# Allegro board LCD.brd
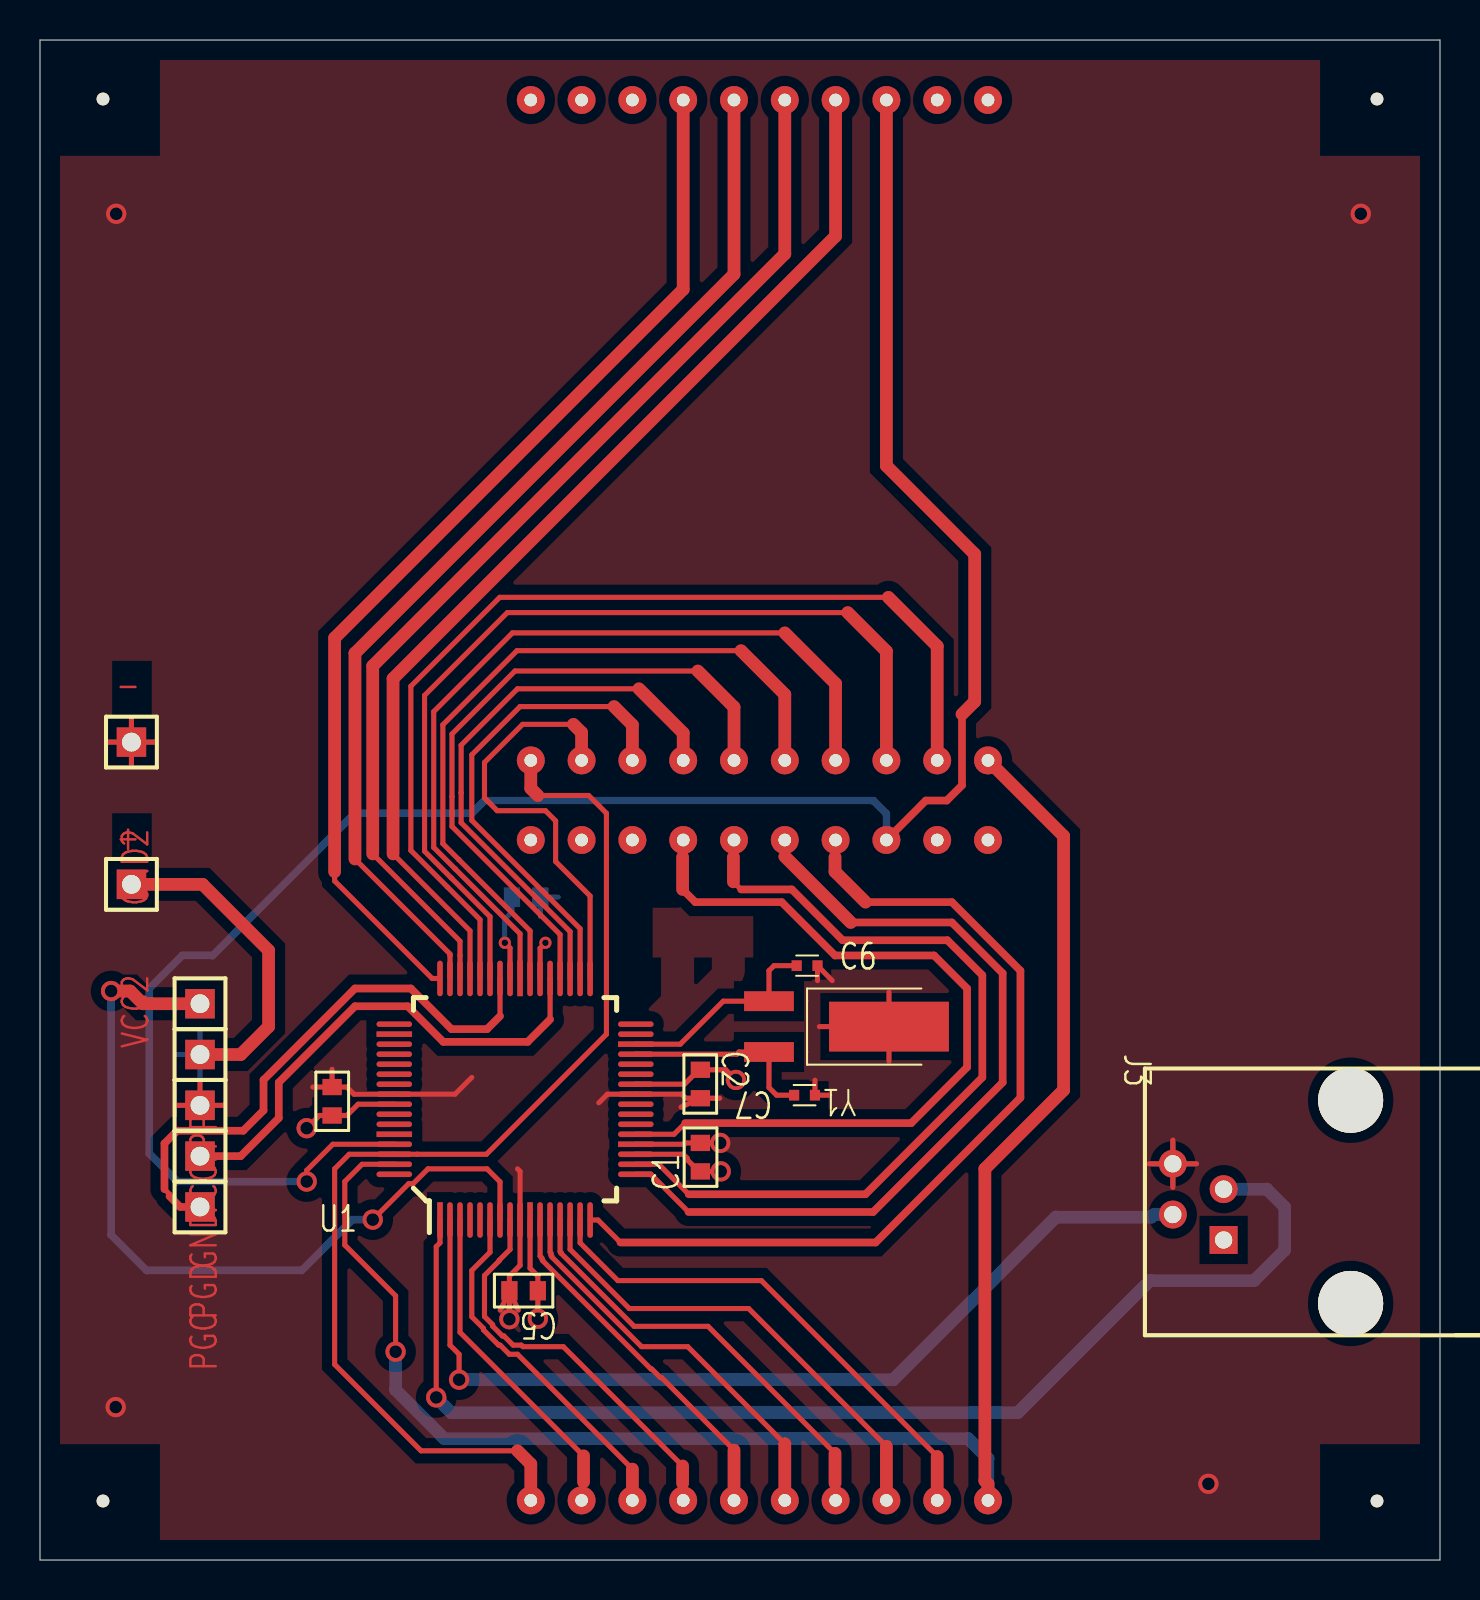
[diagram p0: board, top side]
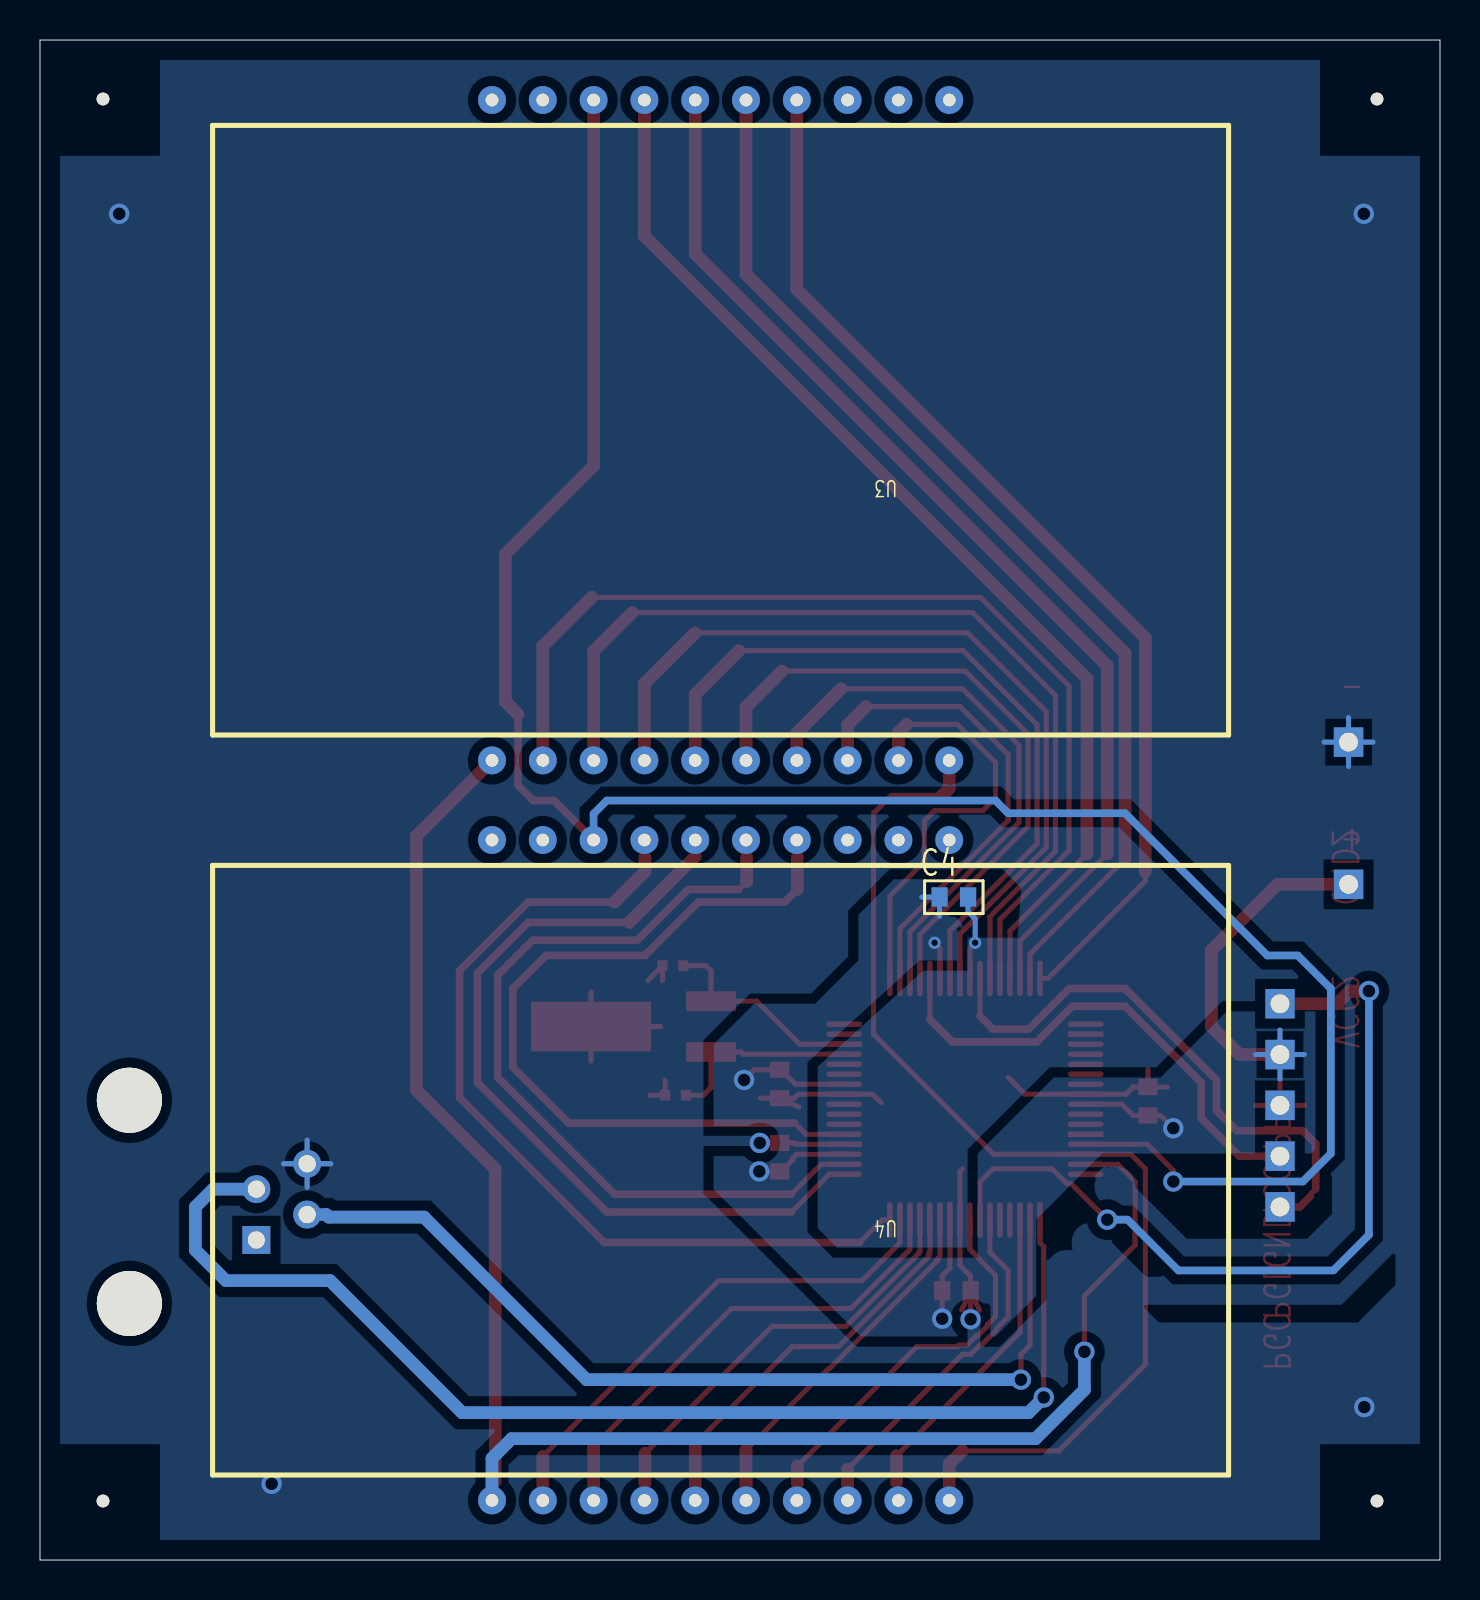
[diagram p1: board, bottom side, seen from below]

Outline 70 x 76 mm; copper layers: TOP, BOTTOM. Coordinates in mm from the lower left corner of the outline.
Outline path: 0,76 0,0 70,0 70,76 0,76

## Placement (name value [footprint] x y rotation side)
C1  470nF  [SMC0603]  33.02 19.43 90 top
C2  470nF  [SMC0603]  33.02 24.51 270 top
C3  470nF  [SMC0603]  14.61 22.23 90 top
C4  470nF  [SMC0603]  25.02 33.15 180 bottom
C5  470nF  [SMC0603]  24.89 13.46 180 top
C6  33pF  [C_0402]  38.35 29.72 0 top
C7  33pF  [C_0402]  38.23 23.24 180 top
GND  PINPAD  [BLKCON100VHTM1SQW1001]  8 22.73 0 top
GND2  PINPAD  [BLKCON100VHTM1SQW1001]  4.57 40.89 0 top
J3  Sensor  [TELETM420FACE6X4ALT]  59.18 16 270 top
NOREF  -  [unnamed]  3.15 2.95 0 top
NOREF#2  -  [unnamed]  66.85 2.95 0 top
NOREF#3  -  [unnamed]  66.85 73.05 0 top
NOREF#4  -  [unnamed]  3.15 73.05 0 top
PGC  PINPAD  [BLKCON100VHTM1SQW1001]  8 17.65 0 top
PGD  PINPAD  [BLKCON100VHTM1SQW1001]  8 20.19 0 top
U1  PIC16F1947  [QUAD50M64WG1260]  20 17 0 top
U3  VIM-404-DP  [VIM_404]  22 73 0 bottom
U4  VIM-404-DP  [VIM_404]  22 36 0 bottom
VCC  PINPAD  [BLKCON100VHTM1SQW1001]  8 25.27 0 top
VCC2  PINPAD  [BLKCON100VHTM1SQW1001]  4.57 33.78 0 top
VPP  PINPAD  [BLKCON100VHTM1SQW1001]  8 27.81 0 top
Y1  32.768kHz  [32_KHZ]  39.62 26.67 180 top

## Library data of the parts
C1-C5 = CAP NP
C6 C7 = C_1: room: xtal
GND GND2 PGC PGD VCC VCC2 VPP = PINPAD: room: dsp_sol
J3 = HEADER 4
U1 = PIC16LF1947
U3 U4 = VIM-404-DP
Y1 = CRYSTAL_2: room: xtal

## Footprints (pads in the part's own frame, mm; a bottom-side part is the same pattern mirrored in y, then rotated)
32_KHZ
  rect 2.489x0.991 smd: 1(3.175,1.27) 2(3.175,-1.27)
  rect 5.994x2.489 smd: 3(-2.825,0)
BLKCON100VHTM1SQW1001
  rect 1.473x1.473 hole 0.94: 1(0,0)
C_0402
  rect 0.508x0.533 smd: 1(-0.521,0) 2(0.521,0)
QUAD50M64WG1260
  rect 0.279x1.778 smd: 1(0,0) 10(4.503,0) 40(4.003,12.078)
  oval 0.279x1.778 smd: 2(0.5,0) 3(1.001,0) 4(1.501,0) 5(2.001,0) 6(2.502,0) 7(3.002,0) 8(3.503,0) 9(4.003,0) 11(5.004,0) 12(5.504,0) 13(6.005,0) 14(6.505,0) 15(7.005,0) 16(7.506,0) 33(7.506,12.078) 34(7.005,12.078) 35(6.505,12.078) 36(6.005,12.078) 37(5.504,12.078) 38(5.004,12.078) 39(4.503,12.078) 41(3.503,12.078) 42(3.002,12.078) 43(2.502,12.078) 44(2.001,12.078) 45(1.501,12.078) 46(1.001,12.078) 47(0.5,12.078) 48(0,12.078)
  oval 1.778x0.279 smd: 17(9.792,2.286) 18(9.792,2.786) 19(9.792,3.287) 21(9.792,4.287) 22(9.792,4.788) 23(9.792,5.288) 24(9.792,5.789) 25(9.792,6.289) 26(9.792,6.789) 27(9.792,7.29) 28(9.792,7.79) 29(9.792,8.291) 31(9.792,9.291) 32(9.792,9.792) 49(-2.286,9.792) 51(-2.286,8.791) 52(-2.286,8.291) 53(-2.286,7.79) 54(-2.286,7.29) 55(-2.286,6.789) 56(-2.286,6.289) 57(-2.286,5.789) 58(-2.286,5.288) 59(-2.286,4.788) 61(-2.286,3.787) 62(-2.286,3.287) 63(-2.286,2.786) 64(-2.286,2.286)
  rect 1.778x0.279 smd: 20(9.792,3.787) 30(9.792,8.791) 50(-2.286,9.291) 60(-2.286,4.287)
SMC0603
  rect 0.813x0.965 smd: 1(0,0) 2(1.422,0)
TELETM420FACE6X4ALT
  round 3.251 hole 3.251: (-6.985,6.35) (3.175,6.35)
  rect 1.397x1.397 hole 0.864: 1(0,0)
  round 1.397 hole 0.864: 2(-1.27,-2.54) 3(-2.54,0) 4(-3.81,-2.54)
unnamed
  round 0.635 hole 3.175 unplated: (0,0)
VIM_404
  round 1.397 hole 0.635: 1(2.54,0) 2(5.08,0) 3(7.62,0) 4(10.16,0) 5(12.7,0) 6(15.24,0) 7(17.78,0) 8(20.32,0) 9(22.86,0) 10(25.4,0) 11(25.4,33.02) 12(22.86,33.02) 13(20.32,33.02) 14(17.78,33.02) 15(15.24,33.02) 16(12.7,33.02) 17(10.16,33.02) 18(7.62,33.02) 19(5.08,33.02) 20(2.54,33.02)

## Nets
+5V: J3.1
GND: C1.2 C2.2 C3.2 C4.2 C5.2 C6.2 C7.1 GND.1 GND2.1 J3.4 U1.9(VSS#9) U1.20(AVSS) U1.25(VSS#25) U1.41(VSS#41) U1.56(VSS#56) Y1.3
VCC: C1.1 C2.1 C3.1 C4.1 C5.1 U1.10(VDD#10) U1.19(AVDD) U1.26(VDD#26) U1.38(VDD#38) U1.57(VDD#57) VCC.1 VCC2.1
COM0: U1.63(RE3/P3C/COM0) U3.11(COM1) U4.11(COM1)
COM1: U1.62(RE4/P3B/COM1) U3.20(COM2) U4.20(COM2)
COM2: U1.61(RE5/P1C/COM2) U3.8(COM3) U4.8(COM3)
COM3: U1.60(RE6/P1B/COM3)
ICD_CLK: PGC.1 U1.42(RB6/ICSPCLK/ICDCLK/SEG38)
ICD_DAT: PGD.1 U1.37(RB7/ICSPDAT/ICDDAT/SEG39)
RE0: J3.2 U1.2(VLCD1/P2D/RE0)
RE1: J3.3 U1.1(VLCD2/P2C/RE1)
SEG0: U1.58(RD0/P2D/SEG0)
SEG1: U1.55(RD1/P2C/SEG1)
SEG2: U1.54(RD2/P2B/SEG2)
SEG3: U1.53(RD3/P3C/SEG3)
SEG4: U1.52(RD4/SDO2/P3B/SEG4)
SEG5: U1.51(RD5/SDI2/SDA2/P1C/SEG5)
SEG6: U1.50(RD6/SCK2/SCL2/P1B/SEG6)
SEG7: U1.49(RD7/SS2/SEG7)
SEG8: U1.47(RB1/SEG8) U3.5(2B/2C/2P)
SEG9: U1.46(RB2/SEG9) U3.6(3B/3C/3P)
SEG10: U1.45(RB3/SEG10) U3.7(4B/4C)
SEG11: U1.44(RB4/SEG11) U3.12(4A/4G/4D)
SEG12: U1.36(RC5/SDO1/SEG12) U3.16(2A//2G/2D)
SEG13: U1.33(RC2/CCP1/P1A/SEG13) U3.19(1F/1E)
SEG14: U1.28(T0CKI/RA4/SEG14)
SEG15: U1.27(CPS4/AN4/RA5/SEG15)
SEG16: U1.35(RC4/SDI1/SDA1/SEG16) U3.17(2F/2E)
SEG17: U1.34(RC3/SCK1/SCL1/SEG17) U3.18(1A/1G/1D)
SEG18: U1.23(CPS1/AN1/RA1/SEG18)
SEG19: U1.17(SRNQ/C2OUT/CPS6/AN6/RF1/SEG19) U4.6(3B/3C/3P)
SEG20: U1.16(SRQ/C1OUT/CPS7/AN7/RF2/SEG20) U4.7(4B/4C)
SEG21: U1.15(C1IN2-/C2IN2-/C3IN2-/CPS8/AN8/R) U4.12(4A/4G/4D)
SEG22: U1.14(C2IN+/CPS9/AN9/RF4/SEG22) U4.13(4F/4E)
SEG23: U1.13(DACOUT/C1IN1-/C2IN1-/CPS10/AN10) U4.14(3A/3G/3D)
SEG24: U1.12(C1IN+/CPS11/AN11/RF6/SEG24) U4.15(3F/3E)
SEG25: U1.11(S\S\1\/C1IN3-/C2IN3-/C3IN3-/CPS) U4.16(2A//2G/2D)
SEG26: U1.8(P1D/CCP5/C3IN1-/CPS12/AN12/RG4/) U4.17(2F/2E)
SEG29: U1.43(RB5/T1G/SEG29) U3.13(4F/4E)
SEG30: U1.48(RB0/INT/SRI/FLT0/SEG30) U3.4(1B/1C/1P)
SEG31: U1.59(RE7/CCP2/P2A/SEG31)
SEG33: U1.24(CPS0/AN0/RA0/SEG33)
SEG34: U1.22(CPS2/VREF-/AN2/RA2/SEG34)
SEG35: U1.21(CPS3/VREF+/AN3/RA3/SEG35) U4.4(1B/1C/1P)
SEG36: U1.40(RA6/OSC2/CLKOUT/SEG36) U3.14(3A/3G/3D)
SEG37: U1.39(RA7/OSC1/CLKIN/SEG37) U3.15(3F/3E)
SEG41: U1.18(VCAP/C1IN0-/C2IN0-/CPS16/AN16/R) U4.5(2B/2C/2P)
SEG42: U1.3(P3A/CCP3/RG0/SEG42) U4.19(1F/1E)
SEG45: U1.6(P3D/CCP4/C3IN0-/CPS13/AN13/RG3/) U4.18(1A/1G/1D)
VPP: U1.7(VPP/M\C\L\R\/RG5) VPP.1
N3119612: C6.1 U1.30(SEG40/T1CKI/T1OSO/RC0) Y1.2
N3119622: C7.2 U1.29(SEG32/CCP2/P2A/T1OSI/RC1) Y1.1

Pads without a net: U1 4 5 31 32 64; U3 1 2 3 9 10; U4 1 2 3 9 10

## Via types
v1: diameter 1.016, hole 0.635, TOP to BOTTOM, 16 vias
v2: diameter 0.61, hole 0.33, TOP to BOTTOM, 2 vias

## Routing (per net, layer and track width the routed paths; a pad name or vN(x,y) marks a point on that pad's centre or on a via; arc(x,y) is an arc through that point)
GND: length 68.3
  TOP w0.254: 23.88,19.56 24,19.43 U1.9 24,14.73 23.47,14.2 C5.2 ; Y1.3 42.45,28.4 ; Y1.3 42.45,24.94 ; Y1.3 38.97,26.67 ; 39.48,23.24 C7.1 38.75,23.99 ; 21.59,24.13 20.75,23.29 U1.56 17.71,23.29 15.7,23.29 15.34,23.65 C3.2 ; 3.35,40.89 GND2.1 ; GND2.1 4.57,39.67 ; GND2.1 4.57,42.11 ; GND2.1 5.79,40.89 ; U1.41 23.5,30.6 v2(23.24,30.86) ; v1(34.01,20.85) C1.2 32.28,20.85 32.22,20.79 U1.20 ; 39.61,28.97 C6.2 38.87,28.97 ; 55.46,19.81 J3.4 ; J3.4 57.82,19.81 ; J3.4 56.64,20.99 ; J3.4 56.64,18.63 ; 6.78,22.73 GND.1 ; GND.1 9.22,22.73 ; GND.1 8,23.95 ; C2.2 32.28,23.09 32.08,23.29 29.79,23.29 U1.25 28.37,23.29 27.94,22.86 ; C2.2 32.05,22.64 ; C2.2 33.99,23.09 ; C3.2 14.61,24.54 ; C3.2 13.64,23.65 ; C5.2 23.91,12.5 ; C5.2 v1(23.47,12.04) ; C5.2 23.03,12.5
  BOTTOM w0.254: 3.35,40.89 GND2.1 ; GND2.1 4.57,42.11 ; GND2.1 5.79,40.89 ; GND2.1 4.57,39.67 ; 55.46,19.81 J3.4 ; J3.4 56.64,18.63 ; J3.4 57.82,19.81 ; J3.4 56.64,20.99 ; C4.2 23.6,32.41 23.24,32.05 v2(23.24,30.86)
  vias: v1(3.81,67.31) v1(3.78,7.65) v1(58.42,3.81) v1(66.04,67.31)
VCC: length 44.8
  TOP w0.254: v1(13.34,21.59) 13.97,22.23 C3.1 15.34,22.23 15.91,22.79 U1.57 ; U1.19 32.16,20.29 32.36,20.09 32.36,20.02 32.94,19.43 C1.1 v1(34.04,19.43) ; v1(34.8,24) 34.29,24.51 C2.1 32.94,24.51 32.22,23.79 U1.26 ; v2(25.27,30.86) 25,30.59 U1.38 ; U1.10 24.5,14.59 24.89,14.2 C5.1 v1(24.89,12.06)
  TOP w0.635: VCC2.1 8.13,33.78 11.43,30.48 11.43,26.67 10.03,25.27 VCC.1
  BOTTOM w0.254: VCC.1 8,26.49 ; VCC.1 9.22,25.27 ; VCC.1 6.78,25.27 ; VCC.1 8,24.05 ; 25.91,33.15 C4.1 25.02,32.18
COM0: length 87.7
  TOP w0.254: v1(17.78,10.41) 17.78,13.21 15.24,15.75 15.24,18.92 16.1,19.79 U1.63
  TOP w0.635: U4.11 47.4,3.81 47.24,3.96 47.24,19.56 51.18,23.5 51.18,36.2 U3.11
  BOTTOM w0.635: U4.11 47.4,5.08 46.41,6.07 20.22,6.07 17.78,8.51 v1(17.78,10.41)
COM1: length 56.6
  TOP w0.254: 23.88,5.46 19.05,5.46 14.73,9.78 14.73,19.56 15.46,20.29 U1.62 22.32,20.29 28.32,26.29 28.32,37.34 27.43,38.23 24.89,38.23
  TOP w0.635: U3.20 24.54,38.58 24.89,38.23 ; 23.88,5.46 24.54,4.8 U4.20
COM2: length 105.8
  TOP w0.254: v1(13.34,18.92) 13.34,19.48 14.64,20.79 U1.61
  TOP w0.381: 46.1,42.29 46.1,38.73 45.34,37.97 44.29,37.97 U4.8
  TOP w0.635: U3.8 42.32,54.71 46.74,50.29 46.74,42.93 46.1,42.29
  BOTTOM w0.381: v1(13.34,18.92) 6.86,18.92 5.46,20.32 5.46,28.57 7.11,30.23 8.64,30.23 15.75,37.34 21.59,37.34 22.23,37.97 41.66,37.97 42.32,37.31 U4.8
ICD_CLK: length 28.4
  TOP w0.254: U1.42 23,27.19 ; 6.22,18.54 6.48,18.29 6.48,18.19
  TOP w0.381: PGC.1 7.01,17.65 6.48,18.19 ; 6.22,18.54 6.22,20.83 6.86,21.46 10.16,21.46 11.18,22.48 11.18,24 15.75,28.57 18.54,28.57 20.57,26.54 22.35,26.54 23,27.19
ICD_DAT: length 24.9
  TOP w0.254: 25.5,27.03 U1.37
  TOP w0.381: 25.5,27.03 24.38,25.91 20.16,25.91 18.38,27.69 15.75,27.69 11.94,23.88 11.94,22.1 10.03,20.19 PGD.1
RE0: length 47.3
  TOP w0.254: v1(20.95,9.02) 20.95,10.29 20.5,10.74 U1.2
  BOTTOM w0.635: J3.2 55.69,17.27 55.56,17.14 50.8,17.14 42.67,9.02 v1(20.95,9.02)
RE1: length 60.6
  TOP w0.254: v1(19.81,8.13) 19.81,15.67 20,15.86 U1.1
  BOTTOM w0.635: J3.3 61.34,18.54 62.23,17.65 62.23,15.49 60.71,13.97 55.5,13.97 48.9,7.37 20.57,7.37 v1(19.81,8.13)
SEG8: length 53.7
  TOP w0.254: 15.75,35.05 20.5,30.3 20.5,30.22 U1.47
  TOP w0.635: U3.5 34.7,64.29 15.75,45.34 15.75,35.05
SEG9: length 54.3
  TOP w0.254: U1.46 21,30.22 21,30.94 16.64,35.31
  TOP w0.635: 16.64,35.31 16.64,44.7 37.24,65.31 U3.6
SEG10: length 54.7
  TOP w0.254: 17.65,35.31 21.5,31.46 U1.45
  TOP w0.635: 17.65,35.31 17.65,44.07 39.78,66.2 U3.7
SEG11: length 50.9
  TOP w0.254: 42.42,48.13 22.99,48.13 18.54,43.69 18.54,35.48 20.38,33.64 20.38,33.64 22,32.02 U1.44
  TOP w0.635: 42.42,48.13 44.86,45.69 U3.12
SEG12: length 33.3
  TOP w0.254: 32.89,44.45 23.75,44.45 20.6,41.3 20.6,38.16 20.6,36.68 26,31.27 U1.36
  TOP w0.635: 32.89,44.45 34.7,42.64 U3.16
SEG13: length 21.6
  TOP w0.254: 26.67,41.78 24.13,41.78 22.23,39.88 22.23,38.1 22.86,37.47 25.27,37.47 25.78,36.96 25.78,34.92 27.51,33.2 U1.33
  TOP w0.635: U3.19 27.08,41.37 26.67,41.78
SEG16: length 28.5
  TOP w0.254: 29.95,43.56 23.88,43.56 21.06,40.74 21.06,38.35 21.06,36.87 26.5,31.42 U1.35
  TOP w0.635: 29.95,43.56 32.16,41.35 U3.17
SEG17: length 24.6
  TOP w0.254: 28.7,42.67 24,42.67 21.59,40.26 21.59,36.98 27.01,31.56 U1.34
  TOP w0.635: U3.18 29.62,41.75 28.7,42.67
SEG19: length 41.4
  TOP w0.254: 32.43,17.4 30.54,19.29 U1.17 ; U4.6 37.24,35.17
  TOP w0.381: 32.43,17.4 41.66,17.4 48.13,23.88 48.13,29.34 45.59,31.88 40.54,31.88
  TOP w0.635: 37.24,35.17 40.54,31.88
SEG20: length 44.2
  TOP w0.254: 29.02,15.88 27.9,17 U1.16 ; 39.75,35.15 39.78,35.17 U4.7
  TOP w0.381: 29.02,15.88 41.78,15.88 49.02,23.11 49.02,29.46 45.59,32.89 41.27,32.89
  TOP w0.635: 39.75,35.15 39.75,34.42 41.27,32.89
SEG21: length 25.6
  TOP w0.254: 44.86,5.18 36.07,13.97 28.89,13.97 27.01,15.86 U1.15
  TOP w0.635: U4.12 44.86,5.18
SEG22: length 24.1
  TOP w0.254: U1.14 26.5,15.53 29.46,12.57 35.43,12.57 42.32,5.69
  TOP w0.635: U4.13 42.32,5.69
SEG23: length 21.9
  TOP w0.254: U4.14 39.78,3.81 39.75,3.83 ; U1.13 26,15.43 26.05,15.39 26.05,15.34 29.71,11.68 33.4,11.68 39.75,5.33
  TOP w0.635: 39.75,3.83 39.75,5.33
SEG24: length 20.2
  TOP w0.254: 37.24,5.81 32.38,10.67 30.08,10.67 25.59,15.15 25.59,15.2 25.55,15.24 25.55,15.35 25.5,15.39 U1.12
  TOP w0.635: U4.15 37.24,5.81
SEG25: length 18.1
  TOP w0.254: U1.11 25,15.19 25.09,15.11 25.09,15.05 25.13,15.01 25.13,14.96 30.55,9.55 30.59,9.55 31.02,9.12 31.08,9.12 34.7,5.5
  TOP w0.635: U4.16 34.7,5.5
SEG26: length 20.1
  TOP w0.254: U4.17 32.16,3.81 32.13,3.83 ; U1.8 23.5,15.53 22.96,14.99 22.96,14.96 22.23,14.22 22.23,12.17 22.63,11.77 22.63,11.69 23.12,11.2 23.2,11.2 23.65,10.74 24.07,10.74 24.14,10.67 26.16,10.67 32.13,4.7
  TOP w0.635: 32.13,4.7 32.13,3.83
SEG29: length 46.6
  TOP w0.254: U1.43 22.5,32.17 20.57,34.1 19.23,35.44 19.23,43.23 23.37,47.37 40.39,47.37
  TOP w0.635: 40.39,47.37 42.32,45.44 U3.13
SEG30: length 53.6
  TOP w0.254: 14.73,34.42 14.73,33.95 19.61,29.08 U1.48
  TOP w0.635: 14.73,34.42 14.73,46.1 32.16,63.53 U3.4
SEG35: length 40.6
  TOP w0.254: 32.26,21.84 31.7,21.29 U1.21 ; U4.4 32.16,35.17 32.13,35.15
  TOP w0.381: 32.26,21.84 43.56,21.84 46.35,24.64 46.35,28.57 44.7,30.23 39.75,30.23 37.08,32.89 32.77,32.89 32.13,33.53
  TOP w0.635: 32.13,35.15 32.13,33.53
SEG36: length 41.7
  TOP w0.254: U1.40 24,31.31 20.76,34.56 19.68,35.63 19.68,42.42 23.62,46.35 37.24,46.35
  TOP w0.635: 37.24,46.35 39.78,43.81 U3.14
SEG37: length 37.3
  TOP w0.254: 35.05,45.47 23.85,45.47 21.69,43.31 20.14,41.76 20.14,35.82 20.95,35.01 24.5,31.46 U1.39
  TOP w0.635: U3.15 37.24,43.28 35.05,45.47
SEG41: length 42
  TOP w0.254: 34.67,33.91 35.05,33.53 ; 32.43,18.29 30.93,19.79 U1.18 ; 34.67,35.15 34.7,35.17 U4.5
  TOP w0.381: 32.43,18.29 41.27,18.29 47.12,24.13 47.12,29.24 45.37,30.99 40.13,30.99 37.59,33.53 35.05,33.53
  TOP w0.635: 34.67,35.15 34.67,33.91
SEG42: length 16.6
  TOP w0.254: 27.18,5.21 21,11.38 U1.3 ; 27.18,3.9 27.08,3.81 U4.19
  TOP w0.635: 27.18,5.21 27.18,3.9
SEG45: length 18
  TOP w0.254: 29.62,4.54 23.88,10.29 23.46,10.29 23.01,10.74 22.93,10.74 22.17,11.5 22.17,11.58 21.59,12.16 21.59,14.48 22.5,15.39 U1.6
  TOP w0.635: U4.18 29.62,4.54
VPP: length 41.4
  TOP w0.254: v1(16.64,17.02) 18.44,18.82 18.66,18.82 19.4,19.56 22.35,19.56 23,18.91 U1.7
  TOP w0.635: VPP.1 5.14,27.81 4.51,28.45 v1(3.56,28.45)
  BOTTOM w0.381: v1(3.56,28.45) 3.56,16.26 5.33,14.48 13.08,14.48 15.62,17.02 v1(16.64,17.02)
N3119612: length 10.6
  TOP w0.254: C6.1 36.7,29.72 36.45,29.46 36.45,27.94 34.16,27.94 32.01,25.79 U1.30
N3119622: length 9.9
  TOP w0.254: C7.2 36.83,23.24 36.45,23.62 36.45,25.4 34.95,25.4 34.84,25.29 U1.29

## Copper pours and planes (outline as drawn; the poured copper is in the pictures)
GND on TOP: 1,1 69,1 69,75 1,75 ; 12 cut-outs
GND on BOTTOM: 1,1 69,1 69,75 1,75 ; 5 cut-outs
VCC on BOTTOM: 6.22,20.32 6.22,27.43 10.67,27.43 13.97,24.13 19.3,24.13 23.11,20.32 23.11,15.11 30.35,15.11 31.62,16.38 31.62,24.89 26.04,29.97 24.13,29.97 24.13,31.62 21.59,31.62 21.46,33.4 22.1,34.04 27.3,34.04 29.08,32.26 29.08,29.97 31.24,27.81 34.29,27.81 36.32,25.78 36.32,21.72 33.4,21.72 33.15,21.46 33.15,20.32 33.27,20.19 36.32,20.19 36.32,18.54 28.96,11.18 24.13,11.18 24.13,12.7 24,12.83 22.61,12.83 22.48,12.7 22.48,11.18 22.23,11.18 20.19,13.21 20.19,17.02 16.89,20.32 ; 1 cut-out

## Text on the board
TOP: - | +
